# Altium PCB Power Board (NCSU Robotics_s conflicted copy 2015-11-11).PcbDoc
Units mil, origin at the board's own origin, x right, y up, seen from the top; angles counter-clockwise.
Board outline 5100 x 2500 mil, 2 copper layers (Top Layer, Bottom Layer); 54 components, 45 nets, 260 pads, 0 vias.
Unrouted connection lines stored in the file: 176.
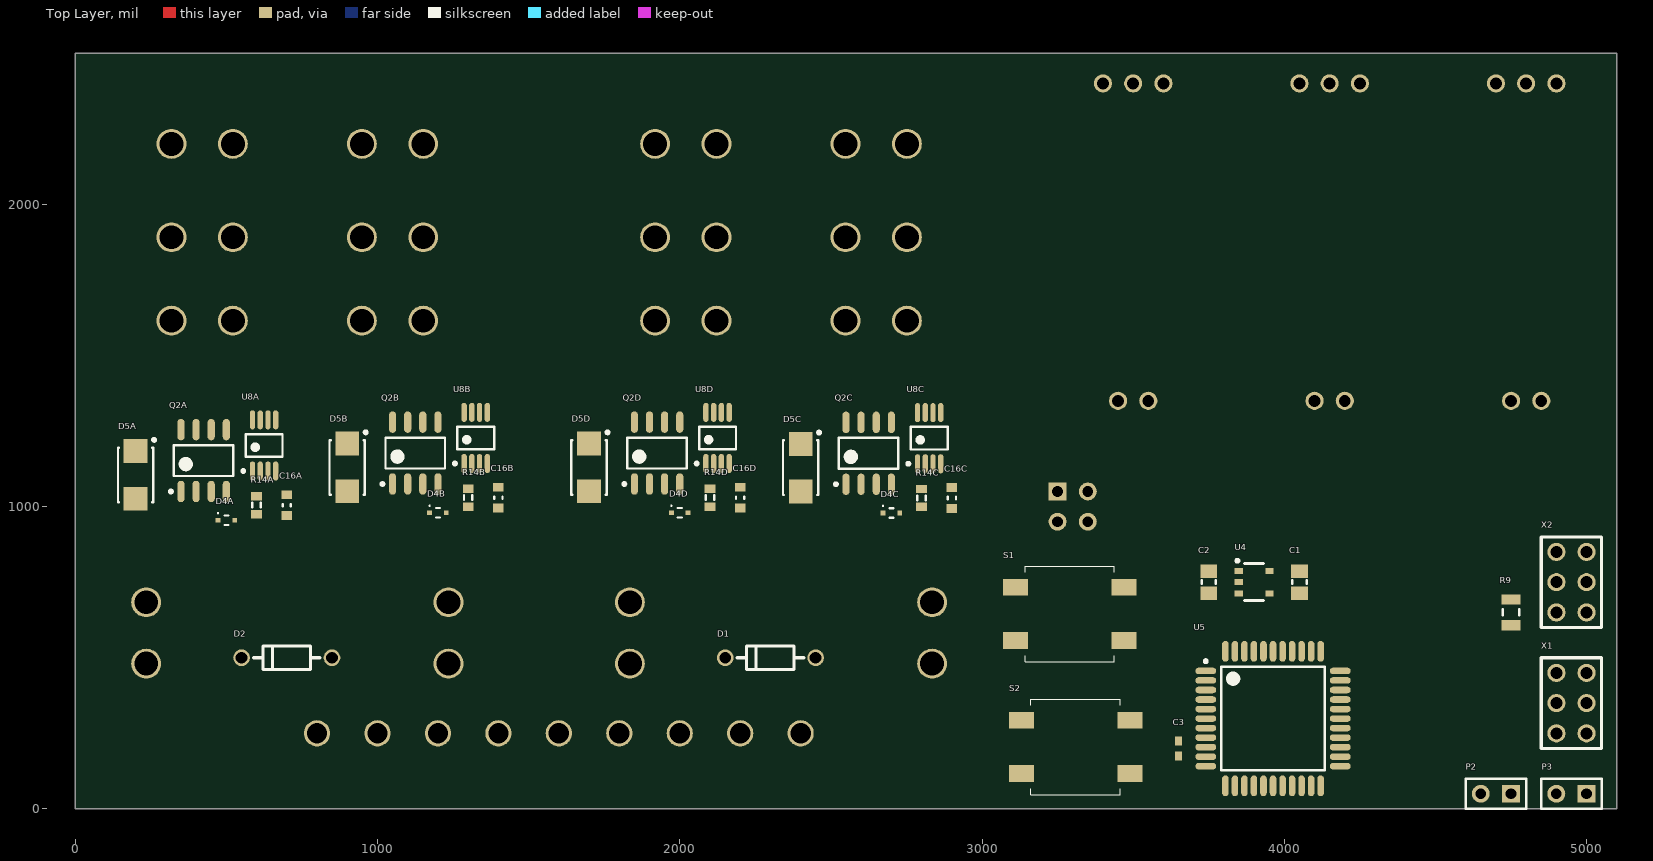
[diagram p0: Top Layer view]
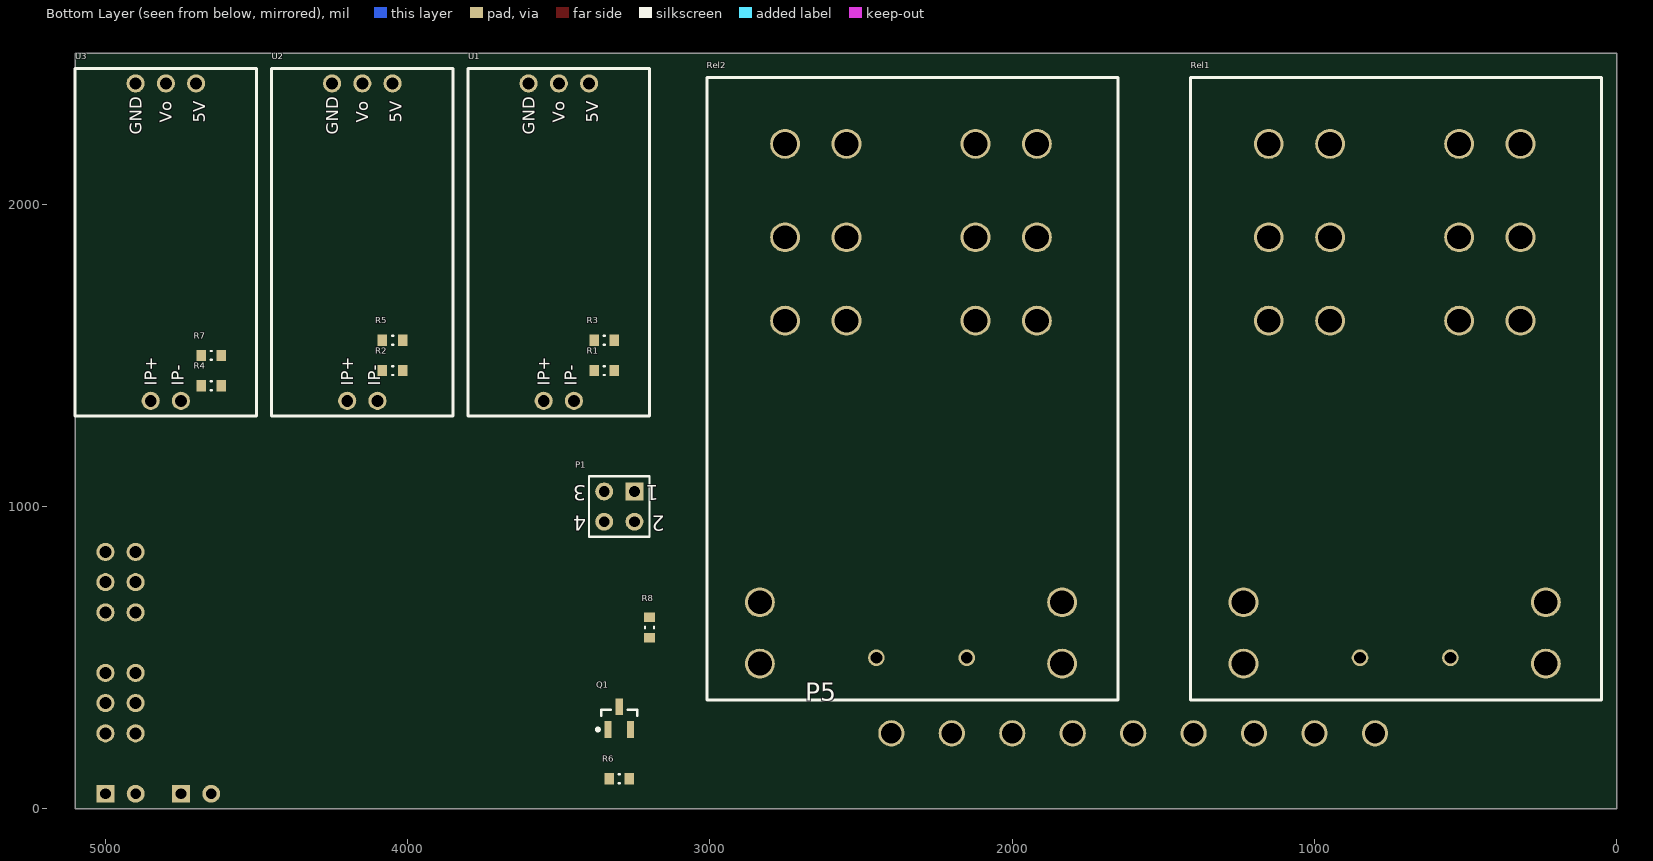
[diagram p1: Bottom Layer view, seen from below]

## Layer stack, top to bottom
Top Solder: solder mask 0.4, Solder Resist, Dk 3.5
Top Layer: signal copper 1.4
Dielectric 1: dielectric 12.6, FR-4, Dk 4.8
Bottom Layer: signal copper 1.4
Bottom Solder: solder mask 0.4, Solder Resist, Dk 3.5

## Board outline
0,0 0,2500 900,2500 5100,2500 5100,0

## Design rules (kind name [scope] priority, off if disabled: settings)
Clearance [All] p1: gap=10 except(6: SMDPad-SMDPad)
Height [All] p1: minheight=0 maxheight=3000 prefheight=500
PolygonConnect [All] p1: connectstyle=Relief reliefconductorwidth=10 reliefentries=4 polygonreliefangle="90 Angle" airgapwidth=10
RoomDefinition D4 [InComponentClass('D4')] p1: confinementstyle=ConfineIn formatcopy=TRUE lockcomponents=FALSE outline 2250,900 2250,1354.33 1600,1354.33 1600,900
RoomDefinition D3 [InComponentClass('D3')] p2: confinementstyle=ConfineIn formatcopy=TRUE lockcomponents=FALSE outline 2950,899.21 2950,1353.54 2300,1353.54 2300,899.21
RoomDefinition D2 [InComponentClass('D2')] p3: confinementstyle=ConfineIn formatcopy=TRUE lockcomponents=FALSE outline 1450,900 1450,1354.33 800,1354.33 800,900
RoomDefinition D1 [InComponentClass('D1')] p4: confinementstyle=ConfineIn formatcopy=TRUE lockcomponents=FALSE outline 750,875.2 750,1329.53 100,1329.53 100,875.2
RoutingVias [All] p1: holewidth=28 width=50 viastyle="Through Hole" minholewidth=28 minwidth=50 maxholewidth=28 maxwidth=50
SolderMaskExpansion [All] p1: expansion=4
UnpouredPolygon [All] p1: allowunpoured=FALSE
Width [All] p1: maxlimit=10 minlimit=10 preferedwidth=10
28 further rules are at their usual default settings.

## Classes and differential pairs
component class Overview: P5
channel class "Diode Controllers": D1 D2 D3 D4
component class "U_Power Conditioning": D1 D2 P1 Q1 R1 R2 R3 R4 R5 R6 R7 R8 Rel1 Rel2 S1 S2 U1 U2 U3
component class U_Microcontroller: C1 C2 C3 P2 P3 R9 U4 U5 X1 X2 X6 X7
component class D4: C16D D4D D5D Q2D R14D U8D
component class D3: C16C D4C D5C Q2C R14C U8C
component class D2: C16B D4B D5B Q2B R14B U8B
component class D1: C16A D4A D5A Q2A R14A U8A

## Components (designator, comment, footprint, x,y, rotation, side; value= is the part's Value field where it differs from the comment)
C1 "Cap" C0805 4050,750 r270 top
C2 "Cap" C0805 3750,750 r270 top
C3 "Cap" C0402 3650,200 r90 top
C16A "Cap" C0603 700,1004.72 r270 top (schematic designator C16)
C16B "Cap" C0603 1400,1029.53 r270 top (schematic designator C16)
C16C "Cap" C0603 2900,1028.74 r270 top (schematic designator C16)
C16D "Cap" C0603 2200,1029.53 r270 top (schematic designator C16)
D1 "Diode" DO-35-0.3 2300,500 r180 top
D2 "Diode" DO-35-0.3 700,500 r180 top
D4A "DDZ9699T-7 Zener" ONSC-SOD-523-2-502-01_C_V 500,954.72 r0 top (schematic designator D4)
D4B "DDZ9699T-7 Zener" ONSC-SOD-523-2-502-01_C_V 1200,979.53 r0 top (schematic designator D4)
D4C "DDZ9699T-7 Zener" ONSC-SOD-523-2-502-01_C_V 2700,978.74 r0 top (schematic designator D4)
D4D "DDZ9699T-7 Zener" ONSC-SOD-523-2-502-01_C_V 2000,979.53 r0 top (schematic designator D4)
D5A "Bidirectional Zener" ONSC-SMA-2-403D-02_C_V 200,1104.72 r270 top (schematic designator D5)
D5B "Bidirectional Zener" ONSC-SMA-2-403D-02_C_V 900,1129.53 r270 top (schematic designator D5)
D5C "Bidirectional Zener" ONSC-SMA-2-403D-02_C_V 2400,1128.74 r270 top (schematic designator D5)
D5D "Bidirectional Zener" ONSC-SMA-2-403D-02_C_V 1700,1129.53 r270 top (schematic designator D5)
P1 "Header 2X2" HDR2X2 3250,1050 r0 bottom
P2 "Header 2" HDR1X2 4750,50 r180 top
P3 "Header 2" HDR1X2 5000,50 r180 top
P5 "Header 10" 1792698 2400,250 r180 bottom
Q1 "N-MOSFET" 2N7002-SOT23 3300,300 r90 bottom
Q2A "BSO033N03MS G" INF-PG-DSO-8-3_N 425,1152.36 r90 top (schematic designator Q2)
Q2B "BSO033N03MS G" INF-PG-DSO-8-3_N 1125,1177.17 r90 top (schematic designator Q2)
Q2C "BSO033N03MS G" INF-PG-DSO-8-3_N 2625,1176.38 r90 top (schematic designator Q2)
Q2D "BSO033N03MS G" INF-PG-DSO-8-3_N 1925,1177.17 r90 top (schematic designator Q2)
R1 "Resistor" R0603 3350,1450 r0 bottom
R2 "Resistor" R0603 4050,1450 r0 bottom
R3 "Resistor" R0603 3350,1550 r180 bottom
R4 "Resistor" R0603 4650,1400 r0 bottom
R5 "Resistor" R0603 4050,1550 r180 bottom
R6 "Resistor" R0603 3300,100 r180 bottom
R7 "Resistor" R0603 4650,1500 r180 bottom
R8 "Resistor" R0603 3200,600 r270 bottom
R9 "Resistor" R0805 4750,650 r270 top
R14A "Res3" J1-0603 600,1004.72 r90 top (schematic designator R14)
R14B "Res3" J1-0603 1300,1029.53 r90 top (schematic designator R14)
R14C "Res3" J1-0603 2800,1028.74 r90 top (schematic designator R14)
R14D "Res3" J1-0603 2100,1029.53 r90 top (schematic designator R14)
Rel1 "DPST Relay, 24V, 30A" "T92 Series Relay" 1050,2200 r270 bottom
Rel2 "DPST Relay, 24V, 30A" "T92 Series Relay" 2650,2200 r270 bottom
S1 "FSM2JSMA" FSM2JSMA 3290.39,645 r90 top
S2 "FSM2JSMA" FSM2JSMA 3309.61,205 r270 top
U1 "AC712 Current Sensor" "AC712 CURRENT SENSOR" 3550,1300 r90 bottom
U2 "AC712 Current Sensor" "AC712 CURRENT SENSOR" 4200,1300 r90 bottom
U3 "AC712 Current Sensor" "AC712 CURRENT SENSOR" 4850,1300 r90 bottom
U4 "XC6701B332" XC6701B332MR 3900,750 r270 top
U5 "ATxmega16D4-AU" 44A_N 3962.6,298.82 r0 top
U8A "LTC4359CMS8#PBF" LT-MS8-8_N 625,1202.36 r90 top (schematic designator U8)
U8B "LTC4359CMS8#PBF" LT-MS8-8_N 1325,1227.17 r90 top (schematic designator U8)
U8C "LTC4359CMS8#PBF" LT-MS8-8_N 2825,1226.38 r90 top (schematic designator U8)
U8D "LTC4359CMS8#PBF" LT-MS8-8_N 2125,1227.17 r90 top (schematic designator U8)
X1 "Header" "2x3 Header" 4950,350 r270 top
X2 "Header" "2x3 Header" 4950,750 r90 top

## Footprints (in the part's own frame and the unit in brackets; to place one, negate y for a bottom-side part, rotate by r counter-clockwise, add the part's x,y. Pads: shape width x height; smd on the part's side, far side on the other; paste and mask are expansions set on the pad)
2N7002-SOT23 [mm] "SOT23, 3-Leads, Body 3.0x2.5mm (max), Pitch 0.95mm, IPC Medium Density"
  rect 1.4x0.6 smd: D(0.95,0) G(-0.95,0.95) S(-0.95,-0.95)
  silkscreen extent -1.07,-1.5 0.7,1.93, body extent -0.7,-1.5 0.7,1.5, height 1.1
"2x3 Header" [mil]
  round 60 hole 40: 1(-100,-50) 2(-100,50) 3(0,-50) 4(0,50) 5(100,-50) 6(100,50)
  silkscreen extent -150,-100 150,100
44A_N [mm] "Thin QFP, 44-Leads, Body 10x10mm, Pitch 0.8mm, IPC Medium Density"
  oval 1.75x0.55 smd: 1(-5.65,4) 2(-5.65,3.2) 3(-5.65,2.4) 4(-5.65,1.6) 5(-5.65,0.8) 6(-5.65,0) 7(-5.65,-0.8) 8(-5.65,-1.6) 9(-5.65,-2.4) 10(-5.65,-3.2) 11(-5.65,-4) 23(5.65,-4) 24(5.65,-3.2) 25(5.65,-2.4) 26(5.65,-1.6) 27(5.65,-0.8) 28(5.65,0) 29(5.65,0.8) 30(5.65,1.6) 31(5.65,2.4) 32(5.65,3.2) 33(5.65,4)
  oval 0.55x1.75 smd: 12(-4,-5.65) 13(-3.2,-5.65) 14(-2.4,-5.65) 15(-1.6,-5.65) 16(-0.8,-5.65) 17(0,-5.65) 18(0.8,-5.65) 19(1.6,-5.65) 20(2.4,-5.65) 21(3.2,-5.65) 22(4,-5.65) 34(4,5.65) 35(3.2,5.65) 36(2.4,5.65) 37(1.6,5.65) 38(0.8,5.65) 39(0,5.65) 40(-0.8,5.65) 41(-1.6,5.65) 42(-2.4,5.65) 43(-3.2,5.65) 44(-4,5.65)
  silkscreen extent -5.77,-4.35 4.35,4.95, body extent -5,-5 5,5, height 1.2
1792698 [mm] "Header, Female, 9 Pin, 0deg , Threaded Flange"
  round 2.2 hole 1.7: 1(0,0) 2(5.08,0) 3(10.16,0) 4(15.24,0) 5(20.32,0) 6(25.4,0) 7(30.48,0) 8(35.56,0) 9(40.64,0)
  body extent -7.49,-10.01 48.14,1.99, height 9.71
"AC712 CURRENT SENSOR" [mil]
  round 60 hole 39.37: 1(50,0) 2(50,-100) 3(1100,50) 4(1100,-50) 5(1100,-150)
  silkscreen extent 0,-350 1150,250, body extent 0,-350 1150,250, height 470
C0402 [mm] "Chip Capacitor, 2-Leads, Body 1.0x0.5mm, IPC Medium Density"
  rect 0.75x0.6 smd: 1(-0.625,0) 2(0.625,0)
  body extent -0.5,-0.25 0.5,0.25, height 0.5
C0603 [mm] "Chip Capacitor, 2-Leads, Body 1.6x0.8mm, IPC Medium Density"
  rect 0.75x0.9 smd: 1(-0.875,0) 2(0.875,0)
  silkscreen extent -0.1,-0.35 0.1,0.35, body extent -0.8,-0.4 0.8,0.4, height 0.6
C0805 [mm] "Chip Capacitor, 2-Leads, Body 2.0x1.3mm, IPC Medium Density"
  rect 1.15x1.4 smd: 1(-0.925,0) 2(0.925,0)
  silkscreen extent -0.15,-0.6 0.15,0.6, body extent -1,-0.63 1,0.63, height 0.6
DO-35-0.3 [mm] "0.3\" Diode DO-35"
  round 1.4 hole 1: 1(-3.8,0) 2(3.8,0)
  silkscreen extent -2.8,-1 2.8,1
FSM2JSMA [mm] "SPST OFF-MOM Switch"
  rect 1.4x2.1 smd: 1(2.24,4.55) 2(2.24,-4.55) 3(-2.24,4.55) 4(-2.24,-4.55)
  silkscreen extent -4,-3.75 4,3.75, body extent -3,-5 3,5, height 4.28
HDR1X2 [mm] "Connector; Header; 2 Position"
  rect 1.5x1.5 hole 0.9: 1(0,0)
  round 1.5 hole 0.9: 2(2.54,0)
  silkscreen extent -1.27,-1.27 3.81,1.27
HDR2X2 [mm] "Connector; Header; 2x2 Position"
  rect 1.5x1.5 hole 0.9: 1(0,0)
  round 1.5 hole 0.9: 2(0,2.54) 3(2.54,0) 4(2.54,2.54)
  silkscreen extent -1.27,-1.27 3.81,3.81
INF-PG-DSO-8-3_N [mm] "SOP, 8-Leads, Body 4.9x3.9mm, Pitch 1.27mm, IPC Medium Density"
  oval 1.8x0.6 smd: 1(-2.6,1.905) 2(-2.6,0.635) 3(-2.6,-0.635) 4(-2.6,-1.905) 5(2.6,-1.905) 6(2.6,-0.635) 7(2.6,0.635) 8(2.6,1.905)
  silkscreen extent -2.72,-2.5 1.3,2.88, body extent -2,-2.5 2,2.5, height 1.75
J1-0603 [mm] "Chip Resistor, Body 1.6x0.8mm, IPC High Density"
  rect 0.7x0.9 smd: 1(-0.75,0) 2(0.75,0)
  silkscreen extent -0.2,-0.35 0.2,0.35, body extent -0.85,-0.48 0.85,0.48, height 0.9
LT-MS8-8_N [mm] "SOP, 8-Leads, Body 3.1x3.1mm, Pitch 0.65mm, IPC Medium Density"
  oval 1.6x0.45 smd: 1(-2.15,0.975) 2(-2.15,0.325) 3(-2.15,-0.325) 4(-2.15,-0.975) 5(2.15,-0.975) 6(2.15,-0.325) 7(2.15,0.325) 8(2.15,0.975)
  silkscreen extent -2.27,-1.55 0.95,1.87, body extent -1.55,-1.55 1.55,1.55, height 1.1
ONSC-SMA-2-403D-02_C_V [mm] "Molded, 2-Leads, Body 4.57x2.92mm"
  rect 2x2 smd: 1(-2,0) 2(2,0)
  silkscreen extent -3.07,-1.48 2.3,1.68, body extent -2.29,-1.46 2.28,1.46, height 2.41
ONSC-SOD-523-2-502-01_C_V [mm] "SOD, 2-Leads, Body 1.2x0.8mm"
  rect 0.4x0.4 smd: 1(-0.7,0) 2(0.7,0)
  silkscreen extent -0.75,-0.4 0.15,0.65, body extent -0.6,-0.4 0.6,0.4, height 0.7
R0603 [mm] "Chip Resistor, 2-Leads, Body 1.5x0.8mm, IPC Medium Density"
  rect 0.8x0.95 smd: 1(-0.85,0) 2(0.85,0)
  silkscreen extent -0.05,-0.38 0.05,0.38, body extent -0.77,-0.4 0.77,0.4, height 0.45
R0805 [mm] "Chip Resistor, 2-Leads, Body 2.0x1.5mm, IPC Medium Density"
  rect 0.85x1.6 smd: 1(-1.075,0) 2(1.075,0)
  silkscreen extent -0.25,-0.7 0.25,0.7, body extent -1,-0.75 1,0.75, height 0.55
"T92 Series Relay" [mil]
  round 99 hole 79: 0(1516.5,815) 0(1719.5,815) 1(1516.5,-185) 1(1719.5,-185) 2(0,528.5) 2(0,731.5) 3(585,528.5) 3(585,731.5) 4(309,528.5) 4(309,731.5) 5(585,-101.5) 5(585,101.5) 6(0,-101.5) 6(0,101.5) 8(309,-101.5) 8(309,101.5)
  silkscreen extent -220,-360 1840,1000, body extent -211,-360 1831,1000, height 1234
XC6701B332MR [mm] "SOT-25"
  rect 0.5x0.7 smd: CE(0.95,1.3) NC(0.95,-1.3) Vin(-0.95,-1.3) Vout(-0.95,1.3) Vss(0,-1.3)
  silkscreen extent -1.8,-1.4 1.55,0.8

## Part data
C1 C2 C3 C16A C16B C16C C16D: "Unpolarized Capacitor"
D1 D2: "General Purpose Diode"
D4A D4B D4C D4D: "Zener diode"
D5A D5B D5C D5D: library part "SMAJ28CA Zener", "Bidirectional Zener diode"
P1: "Header, 2-Pin, Dual row"
P2 P3: "Header, 2-Pin"
P5: "Header, 10-Pin"
Q1: "N-Channel MOSFET"
Q2A Q2B Q2C Q2D: "N-Channel OptiMOS 3 M-Series Power-MOSFET, 30 V VDS, 22 A ID, -55 to 150 degC, PG-DSO-8-16, Reel, Green"
R1 R2 R3 R4 R5 R6 R7 R8 R9: library part Res
R14A R14B R14C R14D: "Resistor"
S1 S2: "Tactile Switch (OFF-MOM)"
U4: "3.3V Linear Regulator"
U5: "8/16-bit AVR XMEGA D4 Microcontroller, 1.6-3.6V, 32MHz, 16KB + 4KB Flash, 1KB EEPROM, 2KB SRAM, 44-pin TQFP, Industrial Grade (-40°C to 85°C), Pb-Free"
U8A U8B U8C U8D: "Ideal Diode Controller with Reverse Input Protection, 4 to 80 V Vin, 8-pin SOP (MS8-8), 0 to 70 degC, Pb-Free"
X1 X2: library part "2x3 Header", "2x3 Header"

## Nets (pads, with @x,y where several pads share a name; then routed paths per layer and width w, separated by ;. In a path a pad name is that pad's centre, name@x,y a point inside that pad or via, vN(x,y) a via of type N, cw(c..) or ccw(c..) an arc to the next point about the centre after c; other vN are vias at no path point)
3V3: R9.2 X2.2
5V: U1.3 U2.3 U3.3
GND: C1.2 C2.2 C3.2 C16A.2 C16B.2 C16C.2 C16D.2 D5A.1 D5B.1 D5C.1 D5D.1 P1.1 P1.3 Q1.S R3.1 R5.1 R7.1 R14A.1 R14B.1 R14C.1 R14D.1 S1.1 S1.2 S2.3 S2.4 U1.5 U2.5 U3.5 U4.Vss U5.8 U5.18 U5.30 U5.38 X1.6 X2.6
MISO: Q1.G U5.26 X1.1
MOSI: U5.25 X1.4
NetC16A_1: C16A.1 C16B.1 Q2A.5 Q2A.6 Q2A.7 Q2A.8 Q2B.5 Q2B.6 Q2B.7 Q2B.8 Rel1.8 U8A.8 U8B.8
NetD1_1: D1.1 R6.2 Rel1.1
NetD2_1: D2.1 R8.2 Rel2.1
NetD4A_1: D4A.1 D5A.2 P5.4 Q2A.1 Q2A.2 Q2A.3 U8A.2 U8A.4 U8A.5
NetD4A_2: D4A.2 Q2A.4 U8A.1
NetD4B_1: D4B.1 D5B.2 P5.2 Q2B.1 Q2B.2 Q2B.3 U8B.2 U8B.4 U8B.5
NetD4B_2: D4B.2 Q2B.4 U8B.1
NetD4C_1: D4C.1 D5C.2 P5.3 Q2C.1 Q2C.2 Q2C.3 U8C.2 U8C.4 U8C.5
NetD4C_2: D4C.2 Q2C.4 U8C.1
NetD4D_1: D4D.1 D5D.2 P5.1 Q2D.1 Q2D.2 Q2D.3 U8D.2 U8D.4 U8D.5
NetD4D_2: D4D.2 Q2D.4 U8D.1
NetP1_2: P1.2 P1.4 R8.1
NetP2_1: P2.1 P5.9 U5.11
NetP2_2: P2.2 P5.8 U5.10
NetP3_1: P3.1 U5.12
NetP3_2: P3.2 U5.13
NetP5_5: P5.5 R2.2 U2.2
NetP5_6: P5.6 R4.2 U3.2
NetP5_7: P5.7 R1.2 U1.2
NetQ1_D: Q1.D R6.1 S2.1 S2.2
NetR1_1: R1.1 R3.2 U5.43
NetR2_1: R2.1 R5.2 U5.44
NetR4_1: R4.1 R7.2 U5.1
NetR14A_2: R14A.2 U8A.6
NetR14B_2: R14B.2 U8B.6
NetR14C_2: R14C.2 U8C.6
NetR14D_2: R14D.2 U8D.6
NetRel1_2: Rel1.2 Rel2.4 U1.1
NetRel1_6: Rel1.6 Rel2.8
NetRel2_2: Rel2.2 U2.1
NetRel2_6: Rel2.6 U3.1
NetS1_3: S1.3 S1.4 U5.20
NetU1_4: U1.4 U5.40
NetU2_4: U2.4 U5.41
NetU3_4: U3.4 U5.42
NetU5_34: U5.34 X2.1
PRE_3V3: C1.1 C3.1 U4.Vout U5.9 U5.19 U5.31 U5.39 X1.2
RAW_24V: C2.1 C16C.1 C16D.1 D1.2 D2.2 Q2C.5 Q2C.6 Q2C.7 Q2C.8 Q2D.5 Q2D.6 Q2D.7 Q2D.8 Rel1.0 Rel1.4 Rel2.0 U4.CE U4.Vin U8C.8 U8D.8
RESET: R9.1 U5.35 X1.5 X2.5
SCK: U5.27 X1.3
pads on no net: Rel1.3 Rel1.5 Rel2.3 Rel2.5 U4.NC U5.2 U5.3 U5.4 U5.5 U5.6 U5.7 U5.14 U5.15 U5.16 U5.17 U5.21 U5.22 U5.23 U5.24 U5.28 U5.29 U5.32 U5.33 U5.36 U5.37 U8A.3 U8A.7 U8B.3 U8B.7 U8C.3 U8C.7 U8D.3 U8D.7 X2.3 X2.4

## Text inside footprints (layer, text, board x,y; h text height)
P1: Bottom Overlay "1" at 3170,1070 h50 r180; Bottom Overlay "2" at 3150,970 h50 r180; Bottom Overlay "4" at 3410,970 h50 r180; Bottom Overlay "3" at 3410,1070 h50 r180
U1: Bottom Overlay "IP-" at 3440,1400 h40 r270; Bottom Overlay "IP+" at 3530,1400 h40 r270; Bottom Overlay "5V" at 3370,2270 h40 r270; Bottom Overlay "Vo" at 3480,2270 h40 r270; Bottom Overlay "GND" at 3580,2230 h40 r270
U2: Bottom Overlay "GND" at 4230,2230 h40 r270; Bottom Overlay "Vo" at 4130,2270 h40 r270; Bottom Overlay "5V" at 4020,2270 h40 r270; Bottom Overlay "IP+" at 4180,1400 h40 r270; Bottom Overlay "IP-" at 4090,1400 h40 r270
U3: Bottom Overlay "IP-" at 4740,1400 h40 r270; Bottom Overlay "IP+" at 4830,1400 h40 r270; Bottom Overlay "5V" at 4670,2270 h40 r270; Bottom Overlay "Vo" at 4780,2270 h40 r270; Bottom Overlay "GND" at 4880,2230 h40 r270